# EAGLE board Logic PCB v31 (EAGLE 9.7.0)
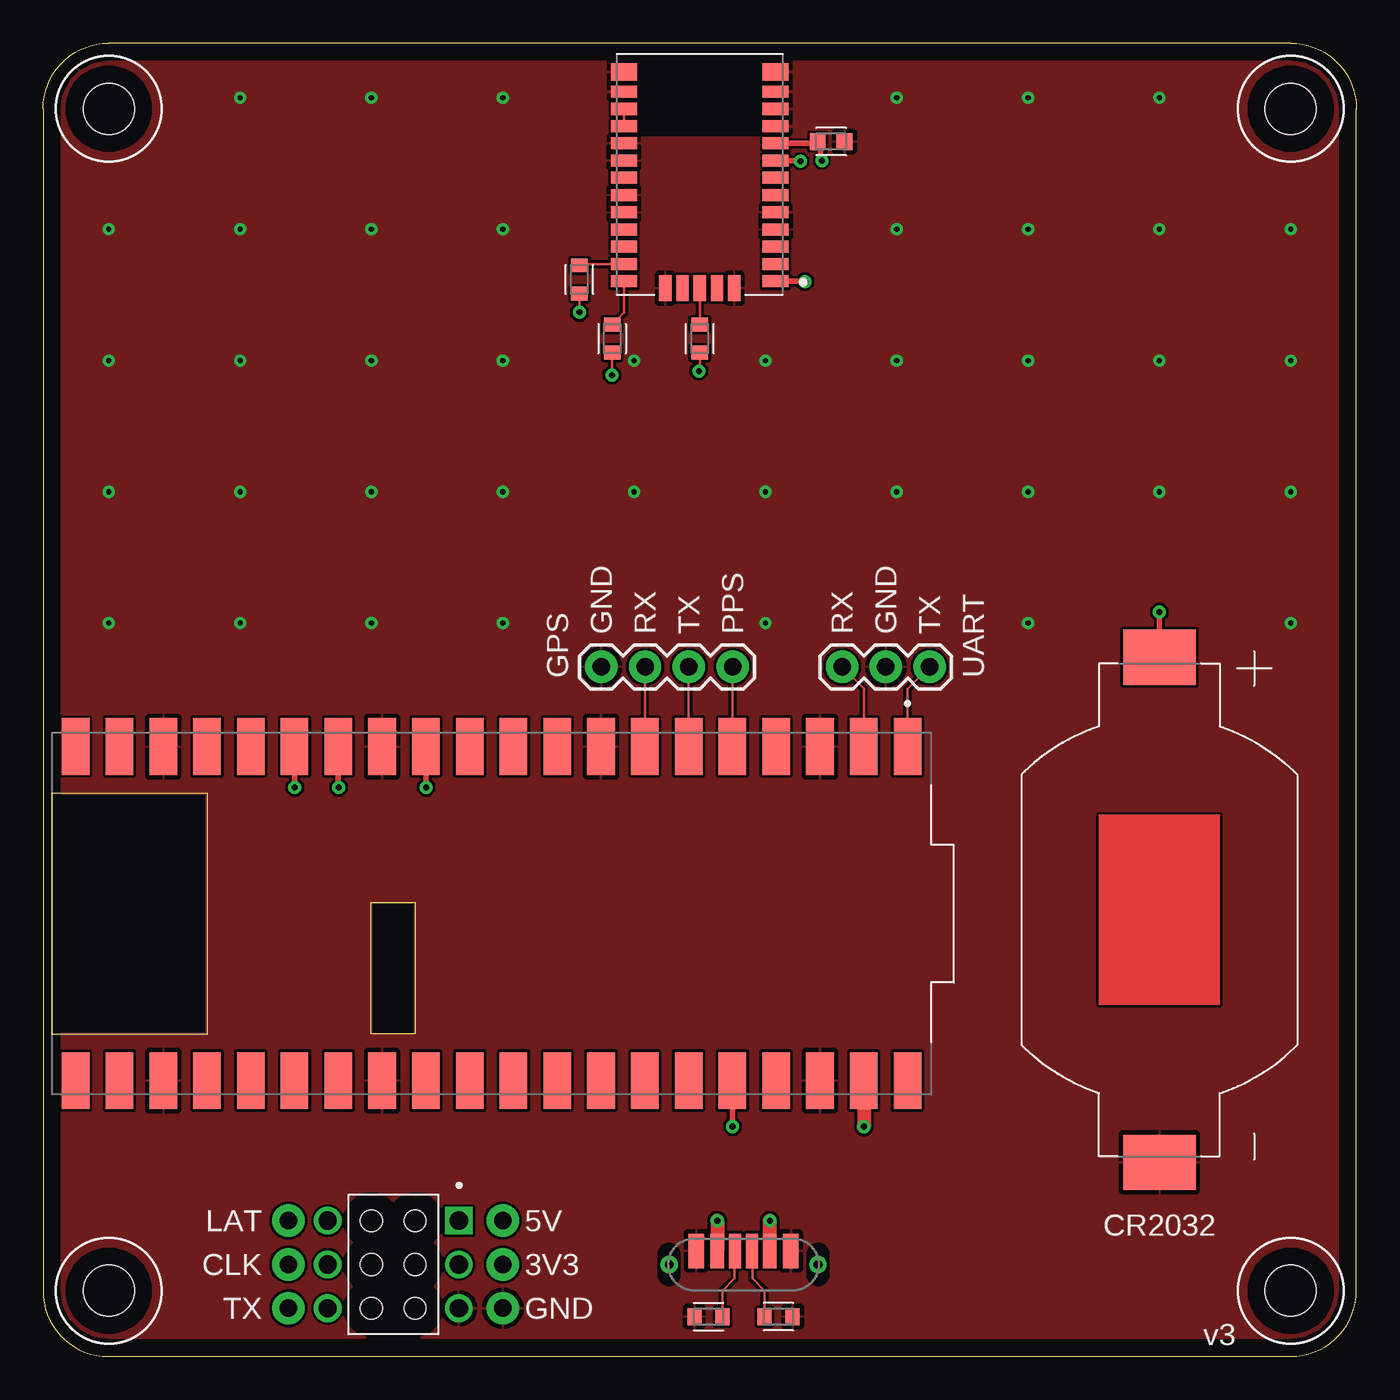
[diagram p0: board, top side]
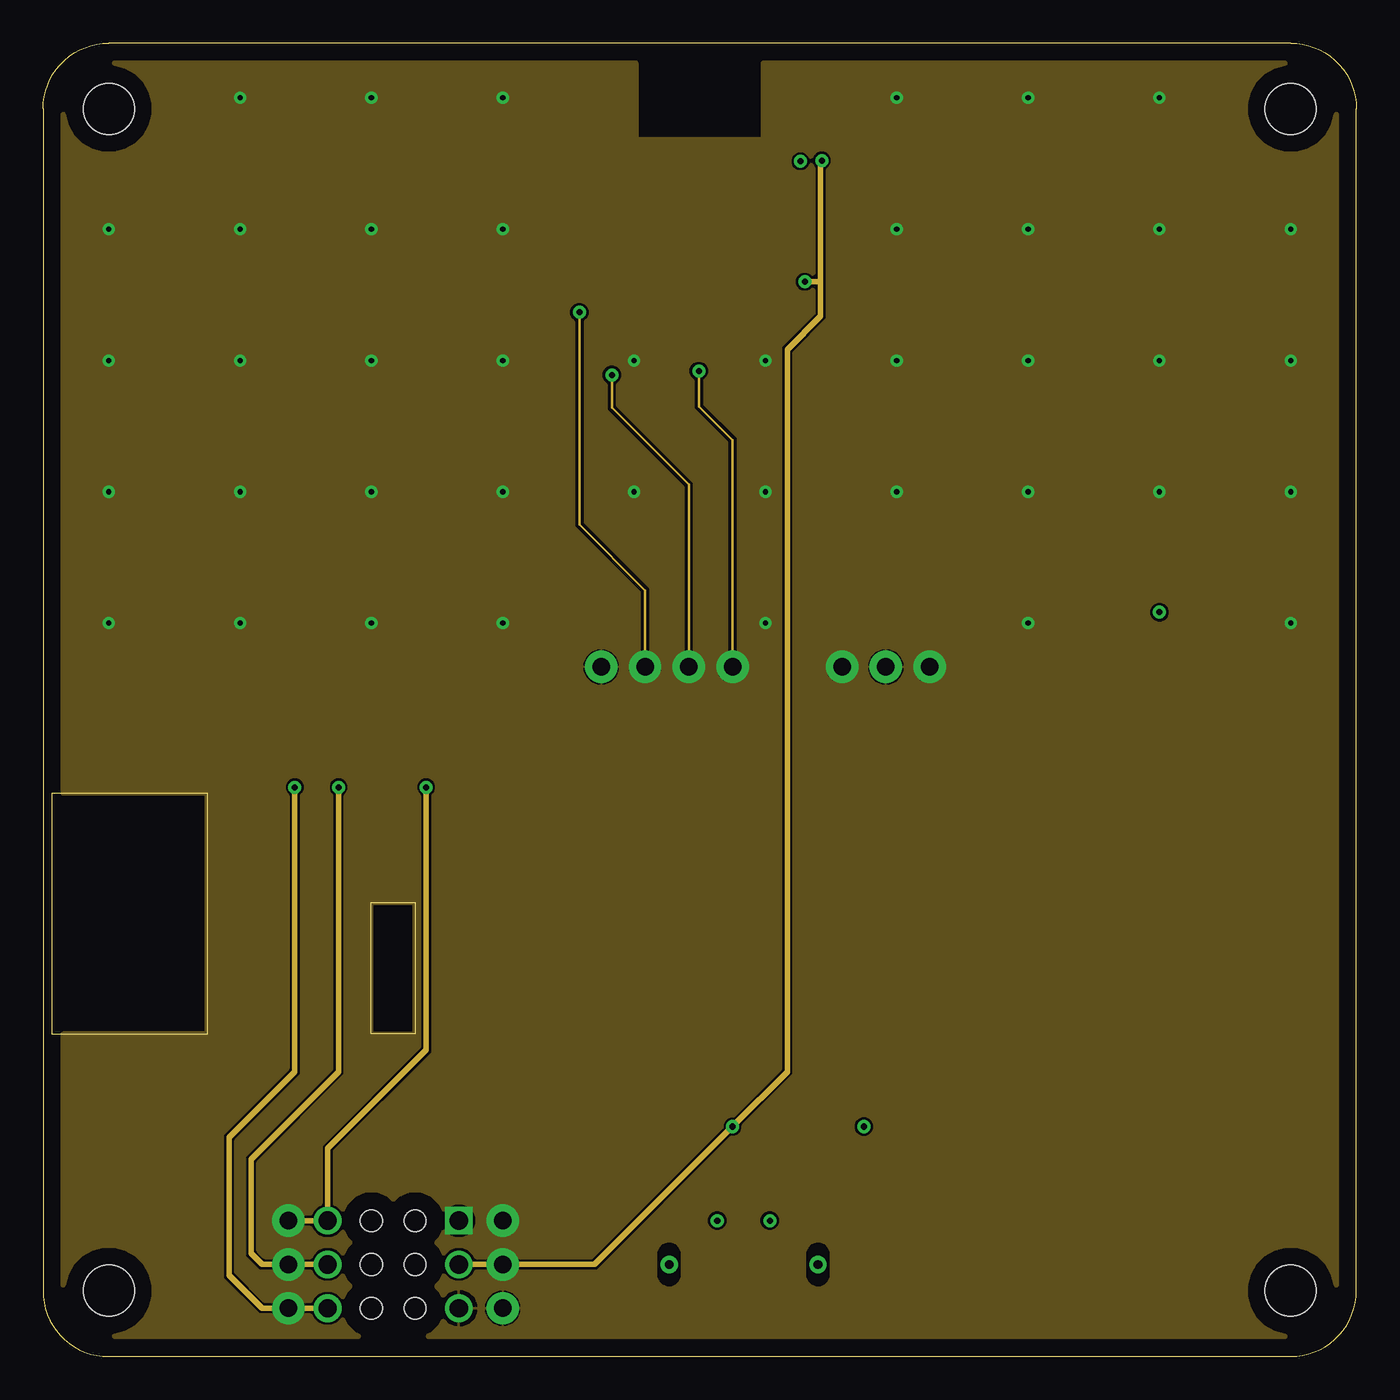
[diagram p1: board, inner layer Route2]
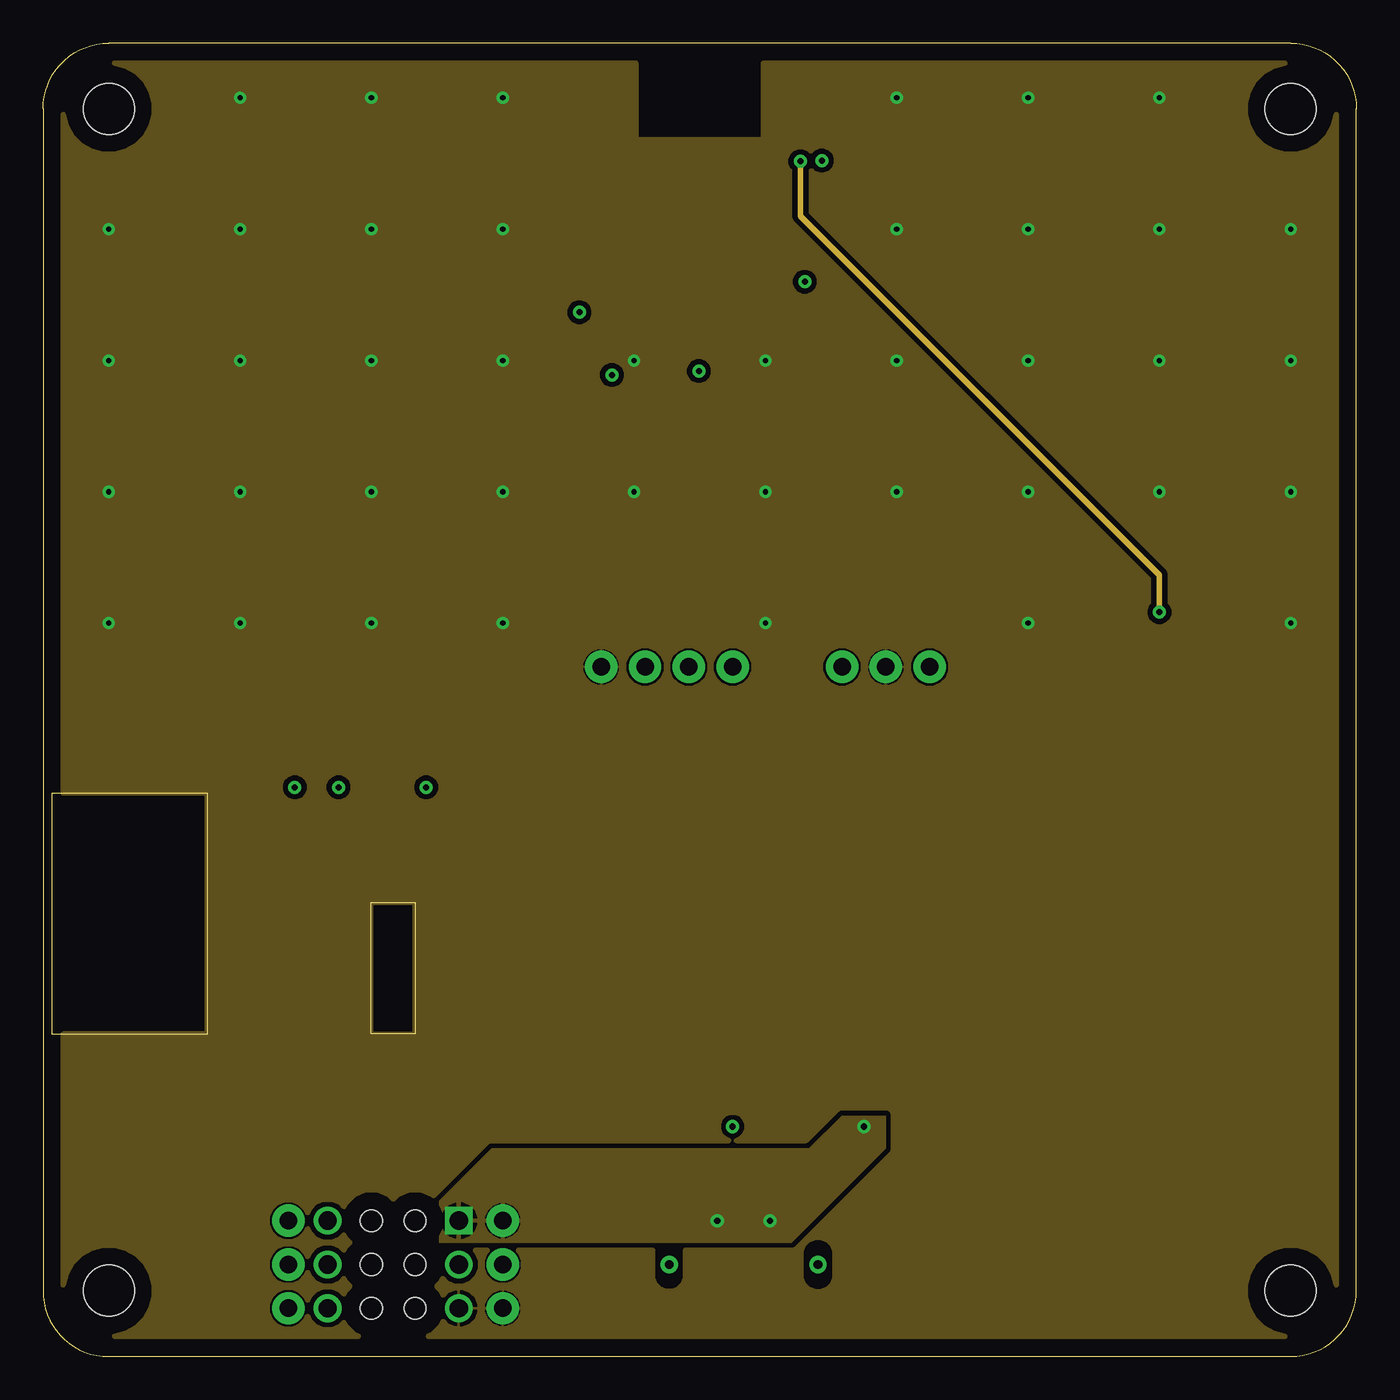
[diagram p2: board, inner layer Route15]
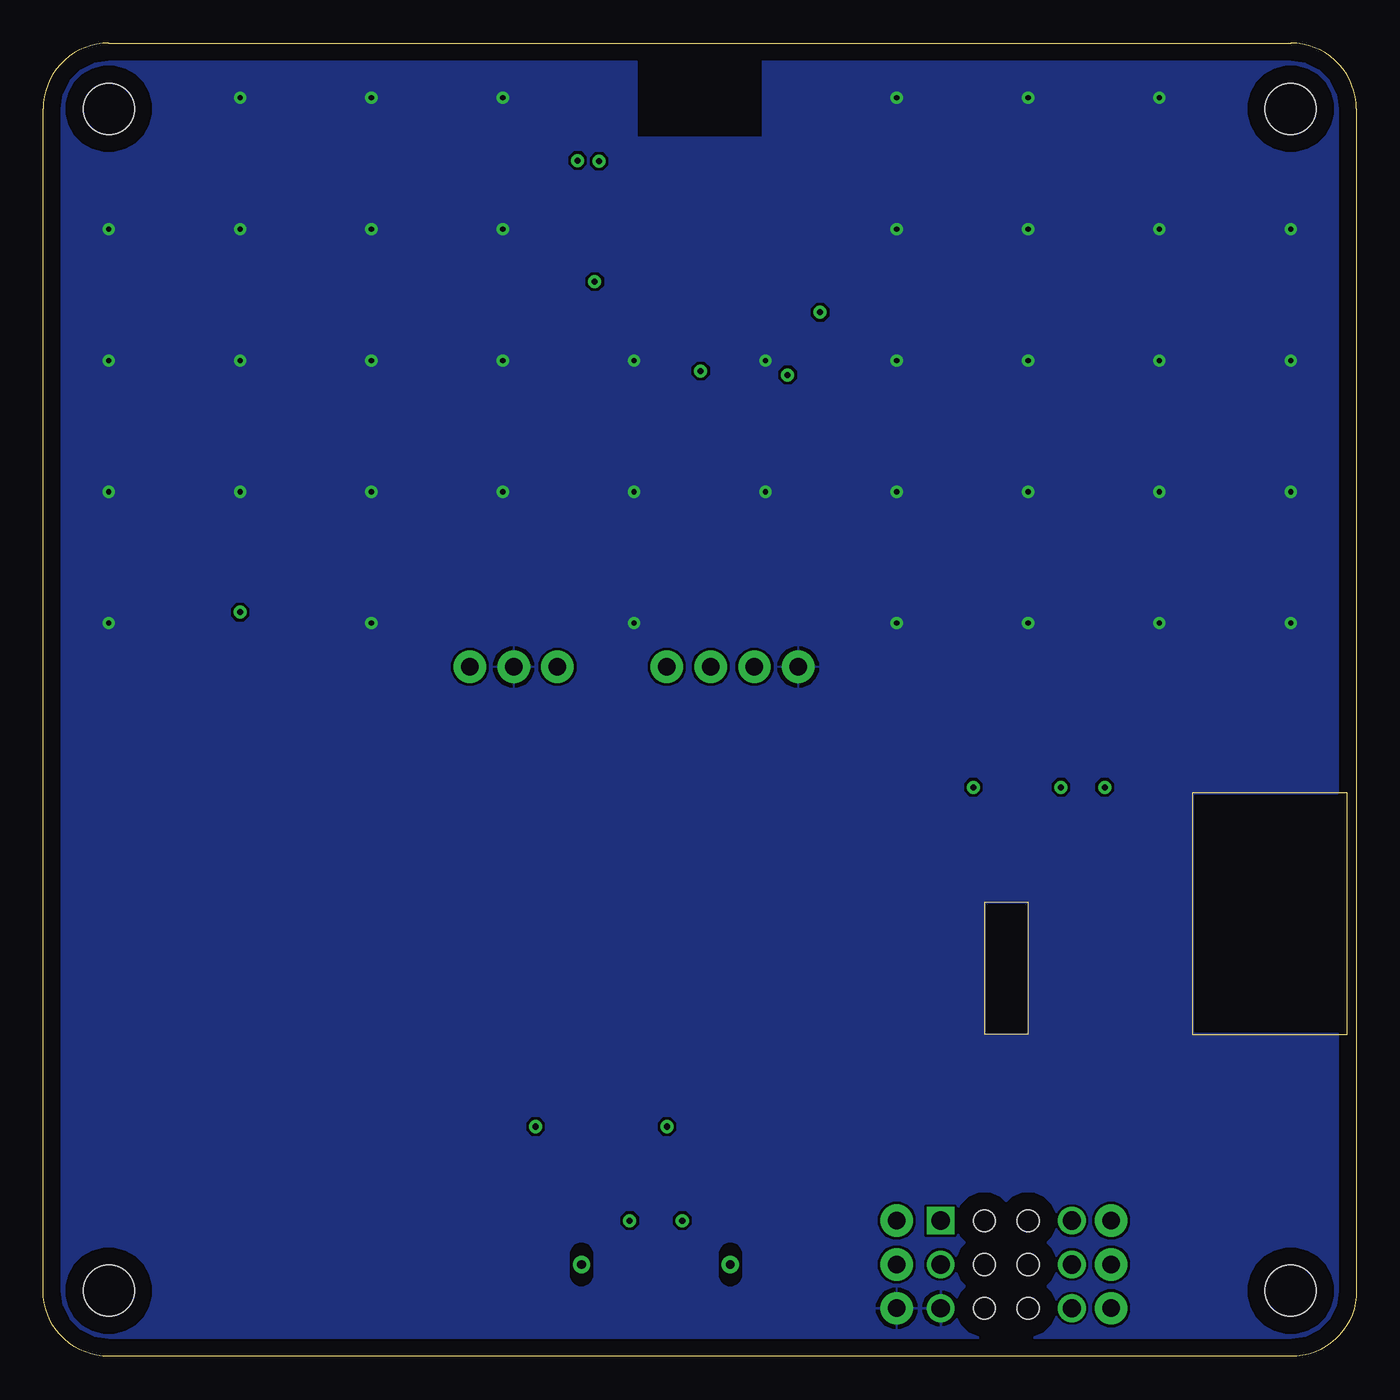
[diagram p3: board, bottom side, seen from below]

Size 76.2 x 76.2 mm. Coordinates in mm from the lower left corner, seen from the top.
Outline: 3.81,0 72.39,0 arc90 76.2,3.81 76.2,72.39 arc90 72.39,76.2 3.81,76.2 arc90 0,72.39 0,3.81 arc91 3.81,0
Copper layers (1+2*15+16): Top / Route2 / Route15 / Bottom
Stack-up 4 Layer Stack: Top SilkScreen Epoxy Ink / Top SolderMask SR:Green 0.0254mm Dk 4.3 / Top Surface Finish Lead-Free 0.02mm / Top CuFoil:007 0.035mm / Dielectric-1 Prepreg:001 0.064mm / Dielectric-2 Prepreg:001 0.064mm / Route2 CuFoil:007 0.035mm / Dielectric-3 User Defined 1.113mm / Route15 CuFoil:007 0.035mm / Dielectric-4 Prepreg:001 0.064mm / Dielectric-5 Prepreg:001 0.064mm / Bottom CuFoil:007 0.035mm / Bottom Surface Finish Lead-Free 0.02mm / Bottom SolderMask SR:Green 0.0254mm Dk 4.3 / Bottom SilkScreen Epoxy Ink
Design rules: minimum copper width 6mil, minimum drill size 0.3mm, copper clearance wire_polygon to wire_polygon 6mil, copper clearance wire_polygon to pad_smd 6mil, copper clearance wire_polygon to via 6mil, copper clearance pad_smd to pad_smd 6mil, copper clearance pad_smd to via 6mil, copper clearance via to via 6mil, copper clearance smd to pad (same net) 6mil, copper clearance smd to via (same net) 6mil, copper clearance smd to smd (same net) 6mil, dimension clearance 40mil, via restrict clearance 0mil, restrict clearance 0mil, drill distance 6mil, keepout clearance 0mil
Holes 2.95 mm at 3.81,72.39 3.81,3.81 72.39,3.81 72.39,72.39

## Footprints (pad centres in the part's own frame; a part is rotated, then mirrored left to right if it is on the bottom)
BAT_BU2032SM-BT-GTR = smd 3.2 x 4.2: + -14.65,0; - 14.65,0
CAPC1608X85 = smd 0.921 x 0.97: 1 -0.775,0; 2 0.775,0
1X04 = drill 1.016 pad 1.88: 1 0,0; 2 2.54,0; 3 5.08,0; 4 7.62,0
HARWIN_M20-7850342 = drill 1.07 square: 1 2.54,-3.81 | drill 1.07: 2 2.54,3.81; 3 0,-3.81; 4 0,3.81; 5 -2.54,-3.81; 6 -2.54,3.81 | hole 1.25: 2.54,-1.27; 2.54,1.27; 0,-1.27; 0,1.27; -2.54,-1.27; -2.54,1.27
1X03_NO_SILK = drill 1.016 pad 1.88: 1 0,0; 2 2.54,0; 3 5.08,0
RESC1608X60 = smd 0.799 x 0.974: 1 -0.815,0; 2 0.815,0
MODULE_RASPBERRY_PI_PICO_W = smd 3.302 x 1.6: 1 -9.69,24.13; 2 -9.69,21.59; 3 -9.69,19.05; 4 -9.69,16.51; 5 -9.69,13.97; 6 -9.69,11.43; 7 -9.69,8.89; 8 -9.69,6.35; 9 -9.69,3.81; 10 -9.69,1.27; 11 -9.69,-1.27; 12 -9.69,-3.81; 13 -9.69,-6.35; 14 -9.69,-8.89; 15 -9.69,-11.43; 16 -9.69,-13.97; 17 -9.69,-16.51; 18 -9.69,-19.05; 19 -9.69,-21.59; 20 -9.69,-24.13; 21 9.69,-24.13; 22 9.69,-21.59; 23 9.69,-19.05; 24 9.69,-16.51; 25 9.69,-13.97; 26 9.69,-11.43; 27 9.69,-8.89; 28 9.69,-6.35; 29 9.69,-3.81; 30 9.69,-1.27; 31 9.69,1.27; 32 9.69,3.81; 33 9.69,6.35; 34 9.69,8.89; 35 9.69,11.43; 36 9.69,13.97; 37 9.69,16.51; 38 9.69,19.05; 39 9.69,21.59; 40 9.69,24.13
LCC100P960X1400X210-31N = smd 1.5 x 0.7: 1 4.4,-6.2; 2 4.4,-5.2; 3 4.4,-4.2; 4 4.4,-3.2; 5 4.4,-2.2; 6 4.4,-1.2; 7 4.4,-0.2; 8 4.4,0.8; 9 4.4,1.8; 10 4.4,2.8; 11 4.4,3.8; 12 4.4,4.8; 15 -4.4,4.8; 16 -4.4,3.8; 17 -4.4,2.8; 18 -4.4,1.8; 19 -4.4,0.8; 20 -4.4,-0.2; 21 -4.4,-1.2; 22 -4.4,-2.2; 23 -4.4,-3.2; 24 -4.4,-4.2; 25 -4.4,-5.2; 26 -4.4,-6.2 | smd 1.5 x 1: 13 4.4,5.95; 14 -4.4,5.95 | smd 0.7 x 1.5: 27 -2,-6.6; 28 -1,-6.6; 29 0,-6.6; 30 1,-6.6; 31 2,-6.6
2171780001 = smd 0.7 x 2: A5 0.5,0.79; B5 -0.5,0.79 | smd 0.8 x 2: A9 -1.52,0.79; B9 1.52,0.79 | smd 0.9 x 2: A12 -2.75,0.79; B12 2.75,0.79 | drill 0.5 pad 1 slot 1.7 rotated 90: SH1 -4.32,0; SH2 4.32,0
1X03 = drill 1.016 pad 1.88: 1 0,0; 2 2.54,0; 3 5.08,0

## Placement (x,y rotation side)
BT1  BU2032SM-BT-GTR  [BAT_BU2032SM-BT-GTR]  64.77,25.91 270 top
C3  4.7uF  [CAPC1608X85]  45.72,70.48 0 top
GPS_TP  [1X04]  40.01,40.01 180 top
J1  M20-7850342  [HARWIN_M20-7850342]  20.32,5.33 90 top
J2  [1X03_NO_SILK]  14.22,2.79 90 top
J3  [1X03_NO_SILK]  26.67,2.79 90 top
R1  220  [RESC1608X60]  33.02,59.05 90 top
R2  220  [RESC1608X60]  38.1,59.05 270 top
R3  5.1K  [RESC1608X60]  42.67,2.31 0 top
R4  5.1K  [RESC1608X60]  38.61,2.31 180 top
R5  220  [RESC1608X60]  31.11,62.48 270 top
U1  RASPBERRY_PI_PICO_W  [MODULE_RASPBERRY_PI_PICO_W]  26.02,25.69 270 top
U2  CAM-M8Q-0  [LCC100P960X1400X210-31N]  38.1,68.58 0 top
U$1  2171780001  [2171780001]  40.64,5.33 0 top
UART_TP  455-1750-1-ND  [1X03]  46.35,40.01 0 top

## Library data of the parts
BT1 = SnapEDA Library; AVAILABILITY: Unavailable; DESCRIPTION: BATTERY HOLDER COIN 20MM SMD; MAXIMUM_PACKAGE_HEIGHT: 5.20mm; MF: MPD _Memory; MP: BU2032SM-HD-G; PACKAGE: None; PARTREV: F; PRICE: None
C3 = Capacitor; CATEGORY: Capacitor; PACKAGE_SIZE: 0603; PACKAGE_TYPE: SMD; SUBCATEGORY: Ceramic Capacitors; TYPE: MLCC
GPS_TP = SparkFun-Connectors; PROD_ID: CONN-09696
J1 = SnapEDA Library; MANUFACTURER: Harwin; MAXIMUM_PACKAGE_HEIGHT: 5.15mm; PARTREV: 11; STANDARD: Manufacturer Recommendations
J2 J3 = SparkFun-Connectors
R1 R2 R5 = Resistor; CATEGORY: Resistors; DESCRIPTION: Chip Resistor 1.60 X 0.82 X 0.60 mm body 0603(1608-METRIC) Package; PACKAGE_SIZE: 0603; PACKAGE_TYPE: SMD
R3 R4 = Tutorial - Fusion 360; CATEGORY: Resistor; SUB-CATEGORY: Fixed
U1 = SnapEDA Library; MANUFACTURER: Raspberry Pi; PARTREV: 2.4; STANDARD: Manufacturer Recommendations
U2 = SnapEDA Library; MANUFACTURER: UBlox
U$1 = GPS Clock Components
UART_TP = SparkFun-Connectors; PROD_ID: XXX-00000

## Nets
3VCC: C3.1 J1.3 J3.2 U1.36 U2.1 U2.9
5VCC: J1.1 J3.3 U1.39 U$1.A9 U$1.B9
ADC_VREF: U1.35
AGND: U1.33
DISP_CLK: J1.4 J2.2 U1.14
DISP_LAT: J1.2 J2.3 U1.12
DISP_TX: J1.6 J2.1 U1.15
GND: BT1.- C3.2 GPS_TP.4 J1.5 J3.1 R3.2 R4.2 U1.3 U1.8 U1.13 U1.18 U1.23 U1.28 U1.38 U2.4 U2.5 U2.10 U2.11 U2.12 U2.13 U2.14 U2.15 U2.18 U2.19 U2.21 U2.22 U2.27 U2.31 U$1.A12 U$1.B12 UART_TP.2
GPS_PPS: GPS_TP.1 R2.2 U1.5
GPS_RX: GPS_TP.3 R5.2 U1.7
GPS_TX: GPS_TP.2 R1.1 U1.6
N$1: R2.1 U2.29
N$2: R3.1 U$1.A5
N$3: R4.1 U$1.B5
N$5: U2.16 U2.17
N$7: R1.2 U2.26
N$12: R5.1 U2.25
UART_RX: U1.2 UART_TP.1
UART_TX: U1.1 UART_TP.3
VBATT: BT1.+ U2.8
VBUS: U1.40

## Tracks (layer width: path | path; a pad name or v marks a point on that pad's centre or on a via)
3VCC  (via drill 0.35)
  Top 0.305: U2.9 44.84,70.38 | 44.84,70.38 C3.1 | 44.84,70.38 45.11,70.11 45.11,69.46 v45.19,69.38 | U1.36 39.99,13.35 v40.01,13.34 | U2.1 44.17,62.38 v44.2,62.36
  Route2 0.305: J1.3 J3.2 32,5.33 v40.01,13.34 43.18,16.51 43.18,58.42 45.12,60.35 45.12,62.36 | v45.19,69.38 45.12,69.31 45.12,62.36 | v44.2,62.36 45.12,62.36
5VCC  (via drill 0.35)
  Top 0.813: U$1.A9 v39.12,7.87 | U$1.B9 v42.16,7.87 | U1.39 47.62,15.99 v47.62,13.34
  pour Route15: 46.35,13.97 48.9,13.97 48.9,12.06 43.43,6.6 22.99,6.6 22.99,9.02 26.04,12.06 44.45,12.06
DISP_CLK  (via drill 0.35)
  Top 0.305: v17.14,33.02 17.13,33.03 U1.14
  Route2 0.305: J1.4 J2.2 12.7,5.33 12.06,5.97 12.06,11.43 17.14,16.51 v17.14,33.02
DISP_LAT  (via drill 0.35)
  Top 0.305: v22.23,33.02 22.21,33.03 U1.12
  Route2 0.305: J2.3 J1.2 16.51,12.06 22.23,17.78 v22.23,33.02
DISP_TX  (via drill 0.35)
  Top 0.305: v14.61,33.02 14.59,33.03 U1.15
  Route2 0.305: J1.6 J2.1 12.7,2.79 10.79,4.7 10.79,12.7 14.61,16.51 v14.61,33.02
GND  (via drill 0.3 pad 0.25)
  other vias: 11.43,73.03 19.05,73.03 26.67,73.03 3.81,65.41 11.43,65.41 19.05,65.41 26.67,65.41 3.81,57.78 11.43,57.78 19.05,57.78 26.67,57.78 3.81,50.16 11.43,50.16 19.05,50.16 26.67,50.16 3.81,42.55 11.43,42.55 19.05,42.55 26.67,42.55 49.53,73.03 57.15,73.03 64.77,73.03 49.53,65.41 57.15,65.41 64.77,65.41 72.39,65.41 49.53,57.78 57.15,57.78 64.77,57.78 72.39,57.78 49.53,50.16 57.15,50.16 64.77,50.16 72.39,50.16 57.15,42.55 72.39,42.55 34.29,50.16 41.91,50.16 41.91,57.78 34.29,57.78 41.91,42.55
  pour Top: -12.7,80.01 -12.7,-6.99 87.63,-6.99 87.63,80.01
  pour Route2: -15.88,83.19 90.81,83.19 90.81,-11.43 -15.88,-11.43
  pour Route15 (isolate 0.305, rank 2): -17.78,85.09 -17.78,-13.97 93.98,-13.97 93.98,85.72
  pour Bottom: -13.97,81.28 -13.97,-8.26 88.9,-8.26 88.9,81.28
GPS_PPS  (via drill 0.35)
  Top 0.152: U1.5 39.99,39.99 GPS_TP.1 | R2.2 38.1,57.22 v38.05,57.17
  Route2 0.152: 39.99,40.02 39.99,53.17 38.05,55.12 v38.05,57.17
  Route2 0.305: GPS_TP.1 39.99,40.02
GPS_RX  (via drill 0.35)
  Top 0.152: U1.7 34.91,39.99 GPS_TP.3 | R5.2 v31.11,60.58
  Route2 0.152: v31.11,60.58 31.11,48.26 34.92,44.45 GPS_TP.3
GPS_TX  (via drill 0.35)
  Top 0.152: U1.6 37.45,39.99 GPS_TP.2 | R1.1 33.02,56.97 v33,56.95
  Route2 0.152: GPS_TP.2 37.47,50.58 33,55.04 v33,56.95
N$1
  Top 0.152: R2.1 U2.29
N$2
  Top 0.152: U$1.A5 41.15,4.52 41.86,3.81 R3.1
N$3
  Top 0.152: U$1.B5 40.13,4.52 39.42,3.81 R4.1
N$5
  Top 0.152: U2.16 U2.17
N$7
  Top 0.152: U2.26 33.7,60.55 R1.2
N$12
  Top 0.152: R5.1 31.2,63.38 U2.25
UART_RX
  Top 0.152: UART_TP.1 47.61,38.75 U1.2
UART_TX
  Top 0.152: UART_TP.3 50.15,38.72 U1.1
VBATT  (via drill 0.35)
  Top 0.152: 43.9,69.38 v43.94,69.34
  Top 0.305: U2.8 43.9,69.38 | v64.77,43.18 BT1.+
  Route15 0.305: v43.94,69.34 43.94,66.17 64.77,45.34 v64.77,43.18
(copper drawn outside any net)
  shapes: Route15 area x1, Route2 area x1

## Text on the board
SilkscreenTop: GND | RX | TX | PPS | RX | GND | TX | GPS | UART | LAT | 5V | CR2032 | CLK | 3V3 | TX | GND | v3